# EAGLE board PCB-2x8GPIO (EAGLE 6.4)
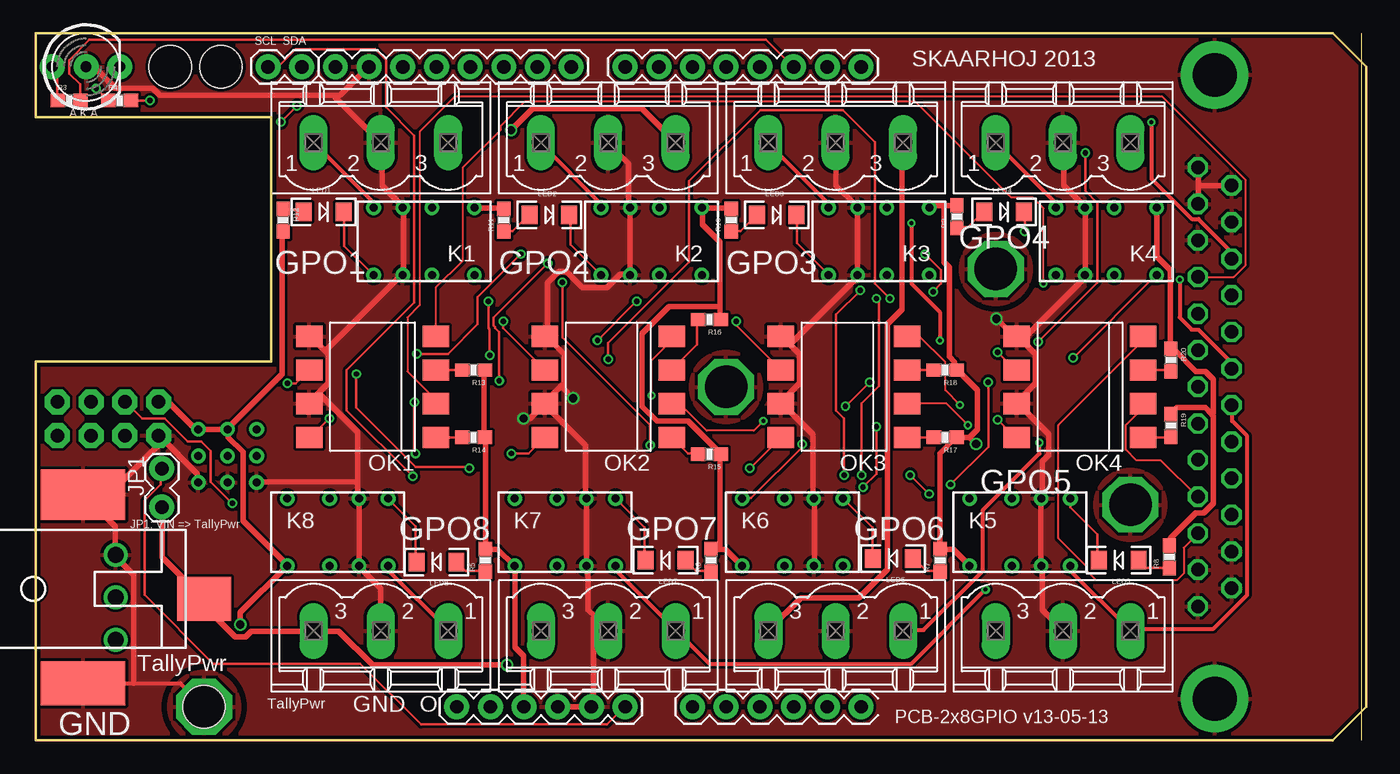
[diagram p0: board, top side]
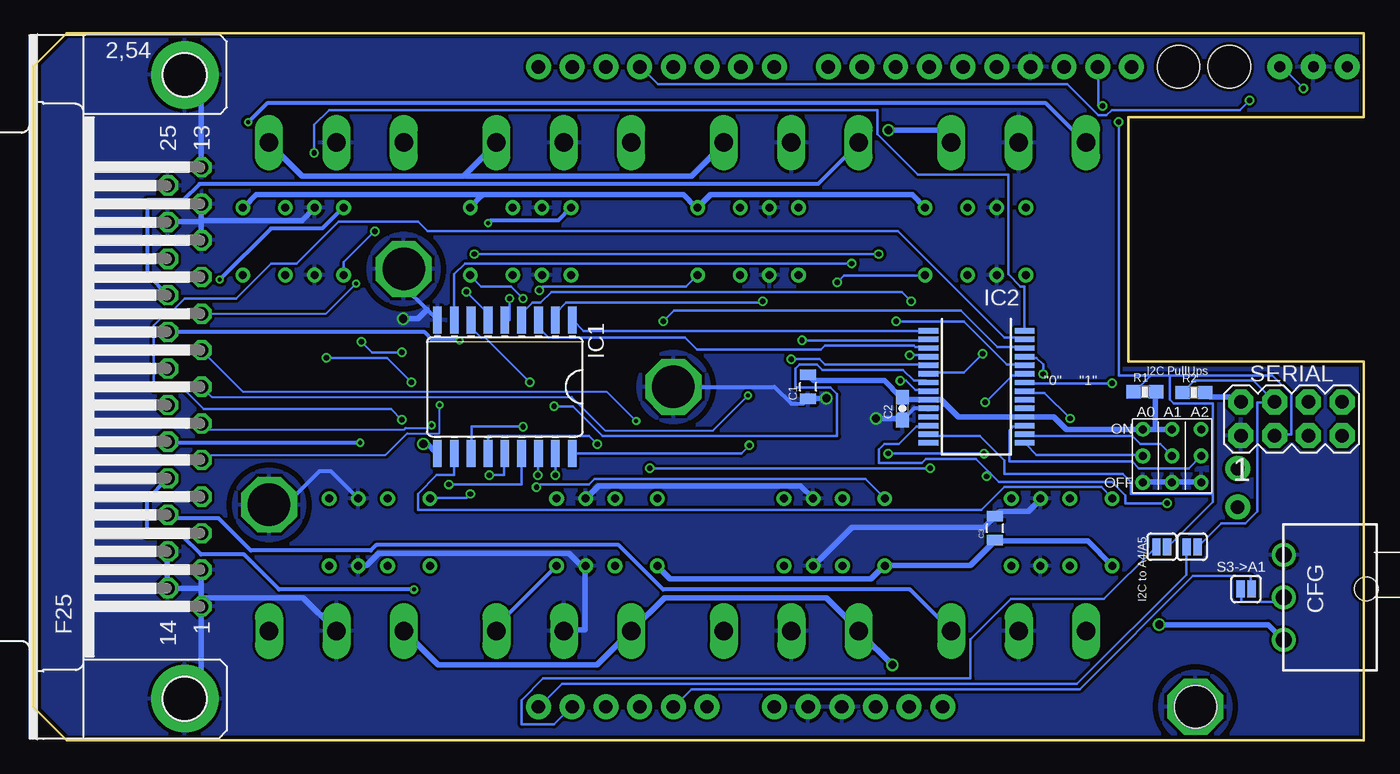
[diagram p1: board, bottom side, seen from below]

Size 100.33 x 53.34 mm. Coordinates in mm from the lower left corner, seen from the top.
Outline: 100,0 100,53.33
Copper layers (1*16): Top 0.035mm / dielectric 1.5mm / Bottom 0.035mm
Design rules "Fusion_eagle_rule_v1.1": minimum track width 6mil, minimum drill 12mil, track to track 6mil, track to pad 6mil, pad to pad 6mil, via to via 6mil, smd to smd 0mil, copper to edge 10mil, drill to drill 10mil, minimum pad ring 10mil, minimum via ring 6mil, stop-mask expansion 2mil, vias tented up to drill 100mil, thermal gap 10mil
Net classes: 0 default: width 0.203 mm, drill 0.406 mm, clearance 0.203 mm; 1 PWR: width 0.406 mm, drill 0.61 mm, clearance 0.203 mm; 2 RELAY LINES: width 0.305 mm, clearance 0.203 mm; 3 INput lines: clearance 0.203 mm
Holes 3.2 mm at 10.16,50.8
tRestrict: area 69.4,32.6 to 75.4,38.6; area 79.5,14.8 to 85.5,20.8; area 9.7,-0.5 to 15.7,5.5; area 49.1,23.7 to 55.1,29.7; area 49.1,23.7 to 55.1,29.7
bRestrict: area 9.7,-0.5 to 15.7,5.5; area 49.1,23.7 to 55.1,29.7; area 69.4,32.6 to 75.4,38.6; area 79.5,14.8 to 85.5,20.8

## Footprints (pad centres in the part's own frame; a part is rotated, then mirrored left to right if it is on the bottom)
0805 = smd 0.8 x 1.2: 1 -0.9,0; 2 0.9,0
0603-CAP = smd 1.1 x 1: 1 -0.85,0; 2 0.85,0
ARDUINO_BOXSHIELD_NOHOLES = drill 1.016 pad 1.88: 0 62.23,50.8; 1 59.69,50.8; 2 57.15,50.8; 3 54.61,50.8; 3.3V 34.29,2.54; 4 52.07,50.8; 5 49.53,50.8; 5V@0 36.83,2.54; 6 46.99,50.8; 7 44.45,50.8; 8 40.386,50.8; 9 37.846,50.8; 10 35.306,50.8; 11 32.766,50.8; 12 30.226,50.8; 13 27.686,50.8; A0 49.53,2.54; A1 52.07,2.54; A2 54.61,2.54; A3 57.15,2.54; A4 59.69,2.54; A5 62.23,2.54; AREF 22.606,50.8; GND@0 39.37,2.54; GND@1 41.91,2.54; GND@4 25.146,50.8; RESET 31.75,2.54; VIN 44.45,2.54 | hole 3.2: 13.97,50.8; 12.7,2.54
MSTBV3 = drill 1.397 long: 1 -5.08,0; 2 0,0; 3 5.08,0
SO18W = smd 0.66 x 2.032: 1 -5.08,-5.029; 2 -3.81,-5.029; 3 -2.54,-5.029; 4 -1.27,-5.029; 5 0,-5.029; 6 1.27,-5.029; 7 2.54,-5.029; 8 3.81,-5.029; 9 5.08,-5.029; 10 5.08,5.029; 11 3.81,5.029; 12 2.54,5.029; 13 1.27,5.029; 14 0,5.029; 15 -1.27,5.029; 16 -2.54,5.029; 17 -3.81,5.029; 18 -5.08,5.029
SSOP28 = smd 0.4 x 1.5: 1 -4.225,-3.625; 2 -3.575,-3.625; 3 -2.925,-3.625; 4 -2.275,-3.625; 5 -1.625,-3.625; 6 -0.975,-3.625; 7 -0.325,-3.625; 8 0.325,-3.625; 9 0.975,-3.625; 10 1.625,-3.625; 11 2.275,-3.625; 12 2.925,-3.625; 13 3.575,-3.625; 14 4.225,-3.625; 15 4.225,3.625; 16 3.575,3.625; 17 2.925,3.625; 18 2.275,3.625; 19 1.625,3.625; 20 0.975,3.625; 21 0.325,3.625; 22 -0.325,3.625; 23 -0.975,3.625; 24 -1.625,3.625; 25 -2.275,3.625; 26 -2.925,3.625; 27 -3.575,3.625; 28 -4.225,3.625
1X02_LOCK = drill 1.016 pad 1.88: 1 -0.178,0; 2 2.718,0
1X02 = drill 1.016 pad 1.88: 1 0,0; 2 2.54,0
DS2Y = drill 0.6: 1 1.2,0.46; 16 1.2,5.54; O1 4.4,0.46; O2 4.4,5.54; P1 6.6,0.46; P2 6.6,5.54; S1 8.8,0.46; S2 8.8,5.54
LED-1206 = smd 1.2 x 1.4: A -1.5,0; C 1.5,0
DIL8-SMD = smd 1.6 x 2: 1 -3.81,-4.77; 2 -1.27,-4.77; 3 1.27,-4.77; 4 3.81,-4.77; 5 3.81,4.77; 6 1.27,4.77; 7 -1.27,4.77; 8 -3.81,4.77
0603-RES = smd 1.1 x 1: 1 -0.85,0; 2 0.85,0
TECONNECTIVITY-DPST = drill 1.2: P$1 3,3.2; P$2 3,0; P$3 3,-3.2
SJ_2S = smd 0.635 x 1.27: 1 -0.412,0; 2 0.412,0
2X4 = drill 1.016 pad 1.88 octagon: 1 -3.81,-1.27; 2 -3.81,1.27; 3 -1.27,-1.27; 4 -1.27,1.27; 5 1.27,-1.27; 6 1.27,1.27; 7 3.81,-1.27; 8 3.81,1.27
POWER_JACK_SMD = smd 6.35 x 3.81: GND -6.756,-7.112 | smd 4.064 x 3.302: PWR -15.9,0.762 | smd 6.35 x 3.302: SHUNT -6.756,7.112 | hole 1.778: -2.997,0
3.2MMPAD = drill 3.2 octagon: P$1 0,0
LED5MM-BICOLOR = drill 0.813 pad 1.88: A2 2.54,0; A3 -2.54,0; K1 0,0
3BITADDR = drill 0.6: A0 -2.2,0; A1 0,0; A2 2.2,0; H1 -2.2,2; H2 0,2; H3 2.2,2; L1 -2.2,-2; L2 0,-2; L3 2.2,-2
F25HP = drill 1.016 octagon: 1 -16.561,-1.27; 2 -13.792,-1.27; 3 -11.049,-1.27; 4 -8.28,-1.27; 5 -5.512,-1.27; 6 -2.769,-1.27; 7 0,-1.27; 8 2.769,-1.27; 9 5.512,-1.27; 10 8.28,-1.27; 11 11.049,-1.27; 12 13.792,-1.27; 13 16.561,-1.27; 14 -15.189,1.27; 15 -12.421,1.27; 16 -9.652,1.27; 17 -6.909,1.27; 18 -4.14,1.27; 19 -1.372,1.27; 20 1.372,1.27; 21 4.14,1.27; 22 6.909,1.27; 23 9.652,1.27; 24 12.421,1.27; 25 15.189,1.27 | drill 3.302 pad 5.08: G1 -23.52,0; G2 23.52,0

## Placement (x,y rotation side)
C1  100nF  [0805]  41.91,26.67 90 bottom
C2  100nF  [0603-CAP]  34.8,25.02 90 bottom
C3  10uF  [0805]  27.81,16 90 bottom
GND  ARDUINO_SHIELD  [ARDUINO_BOXSHIELD_NOHOLES]  0,0 0 top
GPO1  CON1  [MSTBV3]  26.04,45.09 0 top
GPO2  CON1  [MSTBV3]  43.18,45.09 0 top
GPO3  CON1  [MSTBV3]  60.33,45.09 0 top
GPO4  CON1  [MSTBV3]  77.47,45.09 0 top
GPO5  CON1  [MSTBV3]  77.47,8.26 180 top
GPO6  CON1  [MSTBV3]  60.33,8.26 180 top
GPO7  CON1  [MSTBV3]  43.18,8.26 180 top
GPO8  GPO8  [MSTBV3]  26.04,8.26 180 top
IC1  ULN2803A  [SO18W]  64.77,26.67 180 bottom
IC2  MCP23017SS  [SSOP28]  29.21,26.67 270 bottom
JP1  [1X02_LOCK]  9.53,17.78 90 top
JP4  [1X02]  20.07,50.8 180 top
K1  RELAY5VIM03  [DS2Y]  34.29,40.64 180 top
K2  RELAY5VIM03  [DS2Y]  51.44,40.64 180 top
K3  RELAY5VIM03  [DS2Y]  68.58,40.64 180 top
K4  RELAY5VIM03  [DS2Y]  85.72,40.64 180 top
K5  RELAY5VIM03  [DS2Y]  69.22,12.7 0 top
K6  RELAY5VIM03  [DS2Y]  52.07,12.7 0 top
K7  RELAY5VIM03  [DS2Y]  34.92,12.7 0 top
K8  RELAY5VIM03  [DS2Y]  17.78,12.7 0 top
LED1  [LED-1206]  21.72,39.88 0 top
LED2  [LED-1206]  38.73,39.62 0 top
LED3  [LED-1206]  55.88,39.62 0 top
LED4  [LED-1206]  73.03,39.88 0 top
LED5  [LED-1206]  81.66,13.59 180 top
LED6  [LED-1206]  64.64,13.72 180 top
LED7  [LED-1206]  47.5,13.59 180 top
LED8  [LED-1206]  30.23,13.46 180 top
OK1  LTV826S  [DIL8-SMD]  25.4,26.67 90 top
OK2  LTV826S  [DIL8-SMD]  43.18,26.67 90 top
OK3  LTV826S  [DIL8-SMD]  60.96,26.67 90 top
OK4  LTV826S  [DIL8-SMD]  78.74,26.67 90 top
R1  1K5  [0603-RES]  16.51,26.29 0 bottom
R2  1K5  [0603-RES]  12.83,26.24 0 bottom
R3  270  [0603-RES]  2.54,48.26 0 top
R4  270  [0603-RES]  6.35,48.26 0 top
R5  [0603-RES]  33.91,13.59 90 top
R6  [0603-RES]  50.93,13.59 90 top
R7  [0603-RES]  68.2,13.59 90 top
R8  [0603-RES]  85.47,13.84 90 top
R9  [0603-RES]  69.47,39.5 90 top
R10  [0603-RES]  52.45,39.24 90 top
R11  [0603-RES]  35.31,39.24 90 top
R12  [0603-RES]  18.67,39.24 270 top
R13  [0603-RES]  33.02,27.94 180 top
R14  [0603-RES]  33.02,22.86 180 top
R15  [0603-RES]  50.8,21.59 180 top
R16  [0603-RES]  50.8,31.75 180 top
R17  [0603-RES]  68.58,22.86 180 top
R18  [0603-RES]  68.58,27.94 180 top
R19  [0603-RES]  85.6,23.75 270 top
R20  [0603-RES]  85.6,28.7 270 top
S3  CFG  [TECONNECTIVITY-DPST]  3.05,10.79 180 bottom
S3->A1  SOLDERJUMPERNC  [SJ_2S]  8.89,11.43 0 bottom
SERIAL  M04X2  [2X4]  5.46,24.26 0 bottom
SJ1  SOLDERJUMPERNC  [SJ_2S]  15.24,14.61 180 bottom
SJ2  SOLDERJUMPERNC  [SJ_2S]  12.95,14.61 180 bottom
U$3  POWER_JACK_SMD  [POWER_JACK_SMD]  -3.17,11.43 180 top
U$5  GNDPAD  [3.2MMPAD]  12.7,2.54 0 top
U$6  GNDPAD  [3.2MMPAD]  52.07,26.67 0 top
U$7  LEDBICOLOR-AKA  [LED5MM-BICOLOR]  3.81,50.8 0 top
U$8  GNDPAD  [3.2MMPAD]  72.39,35.56 0 top
U$15  GNDPAD  [3.2MMPAD]  82.55,17.78 0 top
U$19  3BITADDR  [3BITADDR]  14.48,21.46 0 bottom
X1  DB25F  [F25HP]  88.9,26.67 90 bottom

## Library data of the parts
C1-C3 JP1 JP4 LED1-LED8 R1-R20 S3->A1 SERIAL SJ1 SJ2 = SparkFun
GND K1-K8 S3 U$3 U$5-U$8 U$15 U$19 = SKAARHOJ
GPO1-GPO8 = con-phoenix-508; MPN: MSTBV 2,5/3-GF-5.08; OC_FARNELL: 1792793; OC_NEWARK: 69R9846
IC1 = uln-udn
IC2 = microchip; MF: MICROCHIP; MPN: MCP23017-E/SS; OC_FARNELL: 1467674; OC_NEWARK: 31K2960
OK1-OK4 = optocoupler; OC_FARNELL: unknown; OC_NEWARK: unknown
X1 = con-subd; OC_FARNELL: unknown; OC_NEWARK: unknown

## Nets
5V [PWR]: C1.2 C2.2 C3.1 GND.5V@0 IC1.10 IC2.9 IC2.18 K1.1 K2.1 K3.1 K4.1 K5.1 K6.1 K7.1 K8.1 R1.2 R2.2 R5.2 R6.2 R7.2 R8.2 R9.2 R10.2 R11.2 R12.2 R13.1 R14.1 R15.1 R16.1 R17.1 R18.1 R19.1 R20.1 S3.P$1 SERIAL.2 U$19.H1 U$19.H2 U$19.H3
A0: IC2.15 U$19.A0
A1: IC2.16 U$19.A1
A1CFG: GND.A1 S3->A1.2
A2: IC2.17 U$19.A2
D2: GND.2 R3.2
D3: GND.3 R4.2
GND [PWR]: C1.1 C2.1 C3.2 GND.GND@0 GND.GND@1 GND.GND@4 GPO1.2 GPO2.2 GPO3.2 GPO4.2 GPO5.2 GPO6.2 GPO7.2 GPO8.2 IC1.9 IC2.10 K1.P1 K1.P2 K2.P1 K2.P2 K3.P1 K3.P2 K4.P1 K4.P2 K5.P1 K5.P2 K6.P1 K6.P2 K7.P1 K7.P2 K8.P1 K8.P2 OK1.5 OK1.7 OK2.5 OK2.7 OK3.5 OK3.7 OK4.5 OK4.7 S3.P$3 SERIAL.1 U$3.GND U$3.SHUNT U$5.P$1 U$6.P$1 U$7.K1 U$8.P$1 U$15.P$1 U$19.L1 U$19.L2 U$19.L3 X1.1 X1.2 X1.11 X1.12 X1.13 X1.14 X1.15 X1.24 X1.25 X1.G1 X1.G2
I2C_SCL: IC2.12 JP4.2 R2.1 SERIAL.4 SJ2.1
I2C_SDA: IC2.13 JP4.1 R1.1 SERIAL.3 SJ1.1
N$1 [RELAY LINES]: GPO1.1 K1.S1 X1.23
N$2: S3->A1.1 S3.P$2
N$3: K1.S2 LED1.C
N$4: IC1.18 K1.16
N$5: IC1.1 IC2.1
N$6 [RELAY LINES]: GPO2.1 K2.S1 X1.22
N$7: R4.1 U$7.A2
N$8: K2.S2 LED2.C
N$9: IC1.17 K2.16
N$10 [RELAY LINES]: GPO3.1 K3.S1 X1.21
N$11: R3.1 U$7.A3
N$12: K3.S2 LED3.C
N$13: IC1.16 K3.16
N$14 [RELAY LINES]: GPO4.1 K4.S1 X1.20
N$15: LED8.A R5.1
N$16: K4.S2 LED4.C
N$17: IC1.15 K4.16
N$18 [RELAY LINES]: GPO5.1 K5.S1 X1.19
N$19: GND.A4 SJ1.2
N$20: K5.S2 LED5.C
N$21: IC1.14 K5.16
N$22 [RELAY LINES]: GPO6.1 K6.S1 X1.18
N$23: GND.A5 SJ2.2
N$24: K6.S2 LED6.C
N$25: IC1.13 K6.16
N$26 [RELAY LINES]: GPO7.1 K7.S1 X1.17
N$27: LED7.A R6.1
N$28: K7.S2 LED7.C
N$29: IC1.12 K7.16
N$30 [RELAY LINES]: GPO8.1 K8.S1 X1.16
N$31 [PWR]: GPO1.3 GPO2.3 GPO3.3 GPO4.3 GPO5.3 GPO6.3 GPO7.3 GPO8.3 JP1.1 U$3.PWR
N$32: K8.S2 LED8.C
N$33: IC1.11 K8.16
N$34: IC1.2 IC2.2
N$35: IC1.3 IC2.3
N$36: IC1.4 IC2.4
N$37: IC1.5 IC2.5
N$38: IC1.6 IC2.6
N$39: IC1.7 IC2.7
N$40: IC1.8 IC2.8
N$41: LED6.A R7.1
N$42: LED5.A R8.1
N$43: LED4.A R9.1
N$44: LED3.A R10.1
N$45: LED2.A R11.1
N$46: LED1.A R12.1
N$47: OK1.3 R13.2
N$48: OK1.1 R14.2
N$49 [INput lines]: OK1.2 X1.10
N$50: OK2.1 R15.2
N$51: IC2.21 OK1.8
N$52: OK2.3 R16.2
N$53: OK3.1 R17.2
N$54: OK3.3 R18.2
N$55 [INput lines]: OK3.2 X1.6
N$56: OK4.1 R19.2
N$57: OK4.3 R20.2
N$60 [INput lines]: OK1.4 X1.9
N$61 [INput lines]: OK2.2 X1.8
N$62 [INput lines]: OK2.4 X1.7
N$63: IC2.28 OK4.6
N$64 [INput lines]: OK3.4 X1.5
N$65 [INput lines]: OK4.2 X1.4
N$66 [INput lines]: OK4.4 X1.3
N$68: IC2.22 OK1.6
N$69: IC2.23 OK2.8
N$70: IC2.24 OK2.6
N$71: IC2.25 OK3.8
N$72: IC2.26 OK3.6
N$73: IC2.27 OK4.8
VIN: GND.VIN JP1.2

## Tracks (layer width: path | path; a pad name or v marks a point on that pad's centre or on a via)
5V  (via drill 0.61)
  Top 0.406: 88.7,24.59 88.19,25.09 86.06,25.09 85.65,24.69 R19.1 | 88.7,24.59 88.8,24.49 88.8,17.88 88.09,17.17 87.48,17.17 85.55,15.24 85.55,14.73 R8.2 | 88.7,24.59 88.8,24.69 88.8,27.23 88.19,27.84 87.48,27.84 85.85,29.46 85.65,29.46 R20.1 85.55,29.67 85.55,35.46 84.53,36.47 84.53,40.13 K4.1 | R11.2 35.26,40.13 33.12,40.13 K1.1 | 51.61,32.72 51.61,37.59 50.29,38.91 50.29,40.13 K2.1 50.49,40.13 52.43,40.13 R10.2 | 51.61,32.72 51.61,31.8 R16.1 | K5.1 70.41,13.21 69.19,14.43 68.28,14.43 R7.2 68.17,14.63 68.17,21.64 69.29,22.76 R17.1 70.41,22.86 | 68.48,40.34 67.56,40.34 67.46,40.23 K3.1 | 68.48,40.34 69.39,40.34 R9.2 | 70.41,22.86 71.02,23.47 71.02,26.42 69.49,27.94 R18.1 69.29,28.04 69.29,28.55 68.89,28.96 68.89,35.66 68.48,36.07 68.48,40.34 | 70.41,22.86 v70.92,22.35 | R12.2 18.59,38.3 18.59,27.64 14.43,23.47 U$19.H2 | U$19.H2 14.22,23.47 12.29,23.47 U$19.H3 12.09,23.47 10.06,25.5 9.35,25.5 SERIAL.2 | 51.61,14.43 52.02,14.43 53.24,13.21 K6.1 | 51.61,14.43 51,14.43 R6.2 | 51.61,14.43 51.61,21.54 R15.1 51.51,21.74 49.17,24.08 46.84,24.08 45.72,25.2 45.72,30.68 47.75,32.72 51.61,32.72 | R13.1 33.83,27.94 33.83,22.86 R14.1 33.93,22.76 33.93,14.63 R5.2 33.93,14.43 34.85,14.43 36.07,13.21 K7.1 36.17,13.01 36.17,7.01 36.78,6.4 36.78,2.54 GND.5V@0 | v15.44,8.74 15.44,9.65 18.9,13.11 K8.1 18.9,13.31 15.65,16.56 15.65,21.74 14.53,22.86 14.53,23.27 U$19.H2
  Bottom 0.406: K1.1 33.12,40.23 34.04,41.15 49.28,41.15 50.19,40.23 K2.1 50.39,40.23 51.31,41.15 66.45,41.15 66.55,41.05 | v70.92,22.35 70.61,22.35 69.9,21.64 IC1.10 | 66.55,41.05 67.36,40.23 K3.1 | K4.1 84.43,40.23 83.52,41.15 66.65,41.15 66.55,41.05 | C1.2 41.86,27.53 41.45,27.13 36.17,27.13 34.95,25.91 C2.2 34.75,25.81 34.65,25.7 32.92,25.7 IC2.9 32.72,25.7 31.9,25.7 30.58,24.38 25.6,24.38 IC2.18 25.4,24.38 23.37,24.38 22.45,23.47 16.87,23.47 U$19.H1 16.66,23.47 15.75,23.47 | SERIAL.2 9.65,25.91 11.58,25.91 11.89,26.21 R2.2 | 15.75,23.47 15.75,26.21 R1.2 | 15.75,23.47 14.53,23.47 U$19.H2 | K8.1 19,13.21 20.83,15.04 27.64,15.04 C3.1 27.84,15.04 29.67,13.21 36.07,13.21 K7.1 36.27,13.11 37.19,12.19 52.32,12.19 53.24,13.11 K6.1 | v15.44,8.74 7.21,8.74 6.1,7.62 S3.P$1
A0
  Bottom 0.203: IC2.15 25.5,22.35 24.69,21.54 16.76,21.54 U$19.A0
A1
  Bottom 0.203: IC2.16 25.5,23.06 25.4,22.96 17.48,22.96 16.87,22.35 15.34,22.35 14.53,21.54 U$19.A1
A1CFG
  Bottom 0.203: S3->A1.2 8.53,11.48 8.53,12.39 12.9,12.39 21.44,3.86 50.7,3.86 52.02,2.54 GND.A1
A2
  Bottom 0.203: IC2.17 25.6,23.67 26.42,23.67 26.72,23.37 26.72,21.03 17.48,21.03 16.97,20.52 13.21,20.52 12.29,21.44 U$19.A2
D2
  Top 0.203: R3.2 3.35,48.26 3.35,49.48 2.54,50.29 2.54,51.31 4.06,52.83 55.07,52.83 57.1,50.8 GND.2
D3  (via drill 0.41)
  Top 0.203: v8.64,48.26 R4.2
  Bottom 0.203: v8.64,48.26 9.35,47.55 19,47.55 19.41,47.14 20.02,47.14 22.35,49.48 53.24,49.48 54.56,50.8 GND.3
GND  (via drill 0.61)
  Top 0.305: U$3.SHUNT 7.42,4.32 10.92,4.32 U$5.P$1
  Top 0.406: GPO2.2 43.18,45.01 44.7,43.48 44.7,40.34 K2.P1 44.81,40.13 44.81,35.15 K2.P2 44.6,35.15 44.09,35.15 43.08,34.14 41.25,34.14 40.03,35.36 39.42,35.36 38.61,34.54 38.61,30.58 OK2.5 38.51,30.48 39.83,29.16 39.83,26.92 39.62,26.72 | GND.GND@0 GND.GND@1 42.06,2.64 42.06,9.25 42.16,9.35 | 39.62,26.72 38.51,25.6 38.51,25.4 OK2.7 | v36.78,24.28 37.29,24.28 38.3,25.3 OK2.7 | 42.16,9.35 43.18,8.33 GPO7.2 | 42.16,9.35 41.66,9.86 41.66,13.01 K7.P1 41.55,13.21 41.55,18.19 K7.P2 41.45,18.39 41.45,22.25 38.61,25.09 38.61,25.3 OK2.7 | 39.62,26.72 v40.54,25.81 | U$19.L3 12.19,19.51 12.19,20.12 9.35,22.96 SERIAL.1 9.55,22.55 4.67,17.68 U$3.GND 3.66,18.49 5.99,16.15 5.99,14.02 S3.P$3 6.1,13.82 7.42,12.5 7.42,4.32 | U$7.K1 4.37,50.8 5.99,49.17 8.84,49.17 9.35,48.67 22.55,48.67 | 22.55,48.67 22.96,48.67 25.09,50.8 GND.GND@4 | 22.55,48.67 22.55,48.56 GPO1.2 26.11,44.91 26.11,41.86 27.64,40.34 K1.P1 27.74,40.13 27.74,35.15 K1.P2 27.53,35.05 21.84,29.36 | GPO8.2 26.01,8.33 26.01,11.48 24.49,13.01 K8.P1 24.38,13.21 24.38,18.19 K8.P2 24.28,18.39 24.28,19.51 | 21.84,29.36 20.73,30.48 OK1.5 | 21.84,29.36 22.05,29.16 22.05,26.92 20.73,25.6 20.73,25.4 OK1.7 21.44,26.11 24.28,23.27 24.28,19.51 | 24.28,19.51 16.76,19.51 U$19.L1 | K6.P1 58.73,13.21 58.73,18.19 K6.P2 58.62,18.39 58.62,23.06 56.39,25.3 OK3.7 56.29,25.4 56.29,25.6 57.61,26.92 57.61,29.16 56.29,30.48 OK3.5 57,29.97 61.98,34.95 K3.P2 61.98,35.15 61.98,40.13 K3.P1 61.87,40.34 60.35,41.86 60.35,45.01 GPO3.2 | GPO5.2 77.42,8.33 75.89,9.86 75.89,13.01 K5.P1 75.79,13.21 75.79,18.19 K5.P2 75.89,18.39 75.89,21.03 76.4,21.54 76.4,23.06 74.17,25.3 OK4.7 74.07,25.4 74.07,25.6 75.39,26.92 75.39,29.16 74.07,30.48 OK4.5
  Top 0.406: OK4.5 74.47,30.28 79.15,34.95 K4.P2 79.15,35.15 79.15,40.13 K4.P1 79.05,40.34 77.52,41.86 77.52,45.01 GPO4.2 | v72.44,31.8 73.76,30.48 OK4.5 | 87.68,41.86 87.68,40.54 X1.12 | 87.68,41.86 87.68,43.18 X1.13 | 87.68,41.86 X1.25
  Bottom 0.305: IC2.10 33.92,25.05 C2.1 | U$8.P$1 72.39,34.24 70.64,32.49 IC1.9 | U$15.P$1 81.28,17.78 78.74,20.32 77.89,20.32 K5.P2 | U$6.P$1 44.45,26.67 43.18,25.4 42.28,25.4 C1.1
  Bottom 0.406: v36.78,24.28 34.85,24.28 C2.1 | v40.54,25.81 41.86,25.81 C1.1 | U$19.L3 12.29,19.51 14.43,19.51 U$19.L2 14.63,19.51 16.66,19.51 U$19.L1 | K8.P2 24.38,18.19 25.3,17.27 27.43,17.27 27.74,16.97 C3.2 27.94,16.76 28.65,16.05 38.61,16.05 41.45,13.21 K7.P1 | GPO6.2 60.25,8.33 58.73,8.33 58.73,13.11 K6.P1 58.93,13.11 59.94,14.12 74.27,14.12 75.18,13.21 75.79,13.21 K5.P1 | 87.68,11.48 87.68,12.8 X1.2 | 87.68,11.48 87.68,10.16 X1.1 | 87.68,11.48 X1.14 90.22,11.58 90.22,14.22 X1.15 | X1.G1 87.68,3.15 87.68,9.96 X1.1 | GPO5.2 77.52,8.33 79.96,10.77 87.58,10.77 X1.1 | 70.64,32.49 71.32,31.8 v72.44,31.8 | 87.68,39.22 87.68,40.44 X1.12 | 87.68,39.22 87.68,39.12 | 87.68,39.12 87.68,37.8 X1.11 | 87.68,39.12 90.12,39.12 X1.24 | X1.G2 87.68,50.19 87.68,43.28 X1.13 | 87.68,39.22 80.06,39.22 79.15,40.13 K4.P1 | K7.P2 41.55,18.29 42.47,19.2 57.71,19.2 58.62,18.29 K6.P2
  pour Bottom: 0,0 100.33,0 100.33,53.34 0,53.34
  pour Top: 0,0 100.33,0 100.33,53.34 0,53.34
I2C_SCL  (via drill 0.41)
  Top 0.203: v14.83,17.88 13.21,19.51 13.21,21.84 12.5,22.55 11.48,22.55 9.75,24.28 8.03,24.28 6.81,25.5 SERIAL.4 | JP4.2 18.29,50.8 19.61,52.12 25.6,52.12 26.42,51.31 26.42,47.75 28.55,45.62 28.55,33.02 23.47,27.94 23.47,24.89 v28.45,19.91
  Bottom 0.203: R2.1 13.61,26.31 12.8,27.13 8.33,27.13 SERIAL.4 6.81,25.5 8.03,25.5 8.03,17.27 8.94,16.36 10.77,16.36 12.5,14.63 SJ2.1 | 28.19,20.17 27.53,19.51 19,19.51 17.98,18.49 17.98,17.88 v14.83,17.88 | 28.19,20.17 29.26,21.23 33.02,21.23 33.33,20.93 36.58,20.93 36.58,21.95 36.17,22.35 35.05,22.35 33.73,23.67 32.92,23.67 IC2.12 | 28.19,20.17 v28.45,19.91
I2C_SDA  (via drill 0.41)
  Top 0.203: v18.49,46.63 v19.71,47.85
  Bottom 0.203: 16.1,27.48 16.05,27.53 14.63,27.53 | 16.1,27.48 17.27,26.31 R1.1 | 14.63,27.53 6.91,27.53 5.49,26.11 5.49,23.06 6.71,23.06 SERIAL.3 | 11.38,18.59 11.38,25.4 14.33,25.4 14.63,25.7 14.63,27.53 | 11.38,18.59 11.38,17.98 14.73,14.63 SJ1.1 | 11.38,18.59 17.58,18.59 17.58,19.51 18.19,20.12 27.13,20.12 27.13,21.13 28.96,22.96 32.72,22.96 32.82,23.06 IC2.13 | v19.71,47.85 20.02,47.85 20.02,50.8 JP4.1 | v18.49,46.63 18.49,27.53 16.15,27.53 16.1,27.48
N$1  (via drill 0.3)
  Top 0.305: GPO1.1 25.4,40.64 25.4,40.23 K1.S1 | v84.12,46.63 84.12,42.37 87.17,39.32 87.68,39.32 90.12,36.88 90.12,36.37 X1.23
  Bottom 0.305: v84.12,46.63 82.7,48.06 23.98,48.06 21.03,45.11 GPO1.1
N$2
  Bottom 0.203: S3->A1.1 9.25,11.38 9.25,10.46 6.4,10.46 6.1,10.77 S3.P$2
N$3
  Top 0.203: LED1.C 23.27,39.83 23.27,37.29 25.4,35.15 K1.S2
N$4  (via drill 0.41)
  Top 0.203: v46.33,22.25 46.33,23.77 39.73,30.38 v39.73,34.54
  Bottom 0.203: IC1.18 46.94,21.64 v46.33,22.25 | v39.73,34.54 39.22,35.05 33.12,35.05 K1.16
N$5
  Bottom 0.203: IC2.1 32.92,30.89 58.83,30.89 59.64,31.7 IC1.1
N$6
  Top 0.305: K2.S1 42.57,40.23 42.57,40.54 38.1,45.01 GPO2.1
  Bottom 0.305: X1.22 91.75,35.15 91.75,40.74 89,40.74 87.78,41.96 41.15,41.96 38.1,45.01 GPO2.1
N$7  (via drill 0.41)
  Top 0.203: v4.57,49.17 5.49,48.26 R4.1
  Bottom 0.203: v4.57,49.17 6.2,50.8 U$7.A2
N$8
  Top 0.203: LED2.C 40.34,39.62 40.34,37.39 42.57,35.15 K2.S2
N$9  (via drill 0.41)
  Top 0.203: v60.96,20.02 60.96,24.28 60.35,24.89 60.35,32.11 v62.18,33.93
  Bottom 0.203: v60.96,20.02 IC1.17 | v62.18,33.93 61.87,34.24 51.1,34.24 50.29,35.05 K2.16
N$10  (via drill 0.3)
  Top 0.305: K3.S1 59.74,40.23 59.74,40.54 55.27,45.01 GPO3.1 | v68.17,30.18 68.17,32.31 66.04,34.44 v66.04,39.01
  Bottom 0.305: v68.17,30.18 70.21,30.18 70.81,30.79 90.12,30.79 X1.21 | v66.04,39.01 65.84,39.22 60.76,39.22 59.84,40.13 K3.S1
N$11
  Top 0.203: R3.1 1.63,48.26 1.63,50.49 1.32,50.8 U$7.A3
N$12
  Top 0.203: LED3.C 57.4,39.62 57.4,37.49 59.74,35.15 K3.S2
N$13  (via drill 0.41)
  Top 0.203: v62.28,20.02 62.28,25.4 63.6,26.72 63.6,33.12 v63.4,33.33
  Bottom 0.203: v62.28,20.02 62.28,21.64 IC1.16 | v63.4,33.33 64.31,34.24 66.55,34.24 67.36,35.05 K3.16
N$14  (via drill 0.3)
  Top 0.305: K4.S1 76.91,40.23 76.91,40.54 72.44,45.01 GPO4.1 | v86.26,34.75 86.26,31.9 87.17,30.99 87.68,30.99 90.12,28.55 90.12,28.04 X1.20
  Bottom 0.305: v86.26,34.75 82.4,38.61 78.54,38.61 77.01,40.13 K4.S1
N$15
  Top 0.203: R5.1 33.83,12.8 32.41,12.8 31.8,13.41 LED8.A
N$16  (via drill 0.41)
  Top 0.203: v74.57,38.41 74.57,39.83 LED4.C
  Bottom 0.203: v74.57,38.41 76.91,36.07 76.91,35.15 K4.S2
N$17  (via drill 0.41)
  Top 0.203: v68.99,19.3 71.83,22.15 v71.83,27.03 | v78.23,28.85 84.43,35.05 K4.16
  Bottom 0.203: IC1.15 63.5,19.3 v68.99,19.3 | v71.83,27.03 73.66,28.85 v78.23,28.85
N$18
  Top 0.305: K5.S1 78.03,13.11 78.03,12.8 82.5,8.33 GPO5.1 82.6,8.43 88.8,8.43 91.34,10.97 91.34,22.96 90.22,24.08 90.22,25.3 X1.19
N$19
  Bottom 0.203: SJ1.2 15.75,14.53 19.61,10.67 26.62,10.67 29.67,7.62 29.67,4.67 61.87,4.67 63.5,3.05 63.5,1.22 61.06,1.22 59.74,2.54 GND.A4
N$20
  Top 0.203: LED5.C 80.06,13.61 80.06,15.54 78.03,17.58 78.03,18.19 K5.S2
N$21  (via drill 0.41)
  Top 0.203: v67.36,18.59 v65.94,20.02
  Bottom 0.203: v65.94,20.02 64.82,20.02 64.82,21.64 IC1.14 | v67.36,18.59 67.67,18.29 70.41,18.29 K5.16
N$22  (via drill 0.3)
  Top 0.305: v75.69,22.45 75.69,21.64 71.42,17.37 71.42,12.8 66.95,8.33 65.43,8.33 GPO6.1
  Bottom 0.305: K6.S1 60.96,13.11 65.33,8.74 65.33,8.33 GPO6.1 | v75.69,22.45 90.12,22.45 X1.18
N$23
  Bottom 0.203: SJ2.2 13.41,14.53 13.41,12.5 21.64,4.27 60.45,4.27 62.18,2.54 GND.A5
N$24
  Top 0.203: LED6.C 63.09,13.72 63.09,16.05 60.96,18.19 K6.S2
N$25  (via drill 0.41)
  Top 0.203: v57.81,22.35 57.81,22.15 53.95,18.29 53.34,18.29 K6.16
  Bottom 0.203: IC1.13 66.04,22.96 58.42,22.96 v57.81,22.35
N$26  (via drill 0.3)
  Top 0.305: K7.S1 43.79,13.11 43.79,12.8 48.26,8.33 GPO7.1 48.36,8.23 50.8,5.79 66.04,5.79 v71.63,11.38
  Bottom 0.305: X1.17 91.75,18.19 91.75,15.44 89.1,15.44 87.68,14.02 84.43,14.02 81.79,11.38 v71.63,11.38
N$27
  Top 0.203: R6.1 50.9,12.8 49.78,12.8 49.07,13.51 LED7.A
N$28
  Top 0.203: LED7.C 45.92,13.61 45.92,16.05 43.79,18.19 K7.S2
N$29  (via drill 0.41)
  Top 0.203: v63.4,23.67 63.4,20.12 v62.38,19.1
  Bottom 0.203: v63.4,23.67 67.26,23.67 67.26,21.64 IC1.12 | v62.38,19.1 62.18,19.3 58.42,19.3 58.01,19.71 37.59,19.71 36.17,18.29 K7.16
N$30
  Top 0.305: K8.S1 26.62,13.11 26.62,12.8 31.09,8.33 GPO8.1
  Bottom 0.305: X1.16 89.92,16.76 86.36,16.76 83.92,14.33 74.88,14.33 74.47,14.73 56.19,14.73 52.83,11.38 34.24,11.38 GPO8.1
N$31  (via drill 0.61)
  Top 0.406: v35.87,46.02 37.49,47.65 45.72,47.65 48.26,45.11 GPO2.3 | JP1.1 9.55,17.58 9.55,13.82 12.7,10.67 U$3.PWR 12.9,10.57 12.9,9.96 15.04,7.82 15.85,7.82 16.26,8.23 20.93,8.23 GPO8.3 21.13,8.23 22.86,8.23 25.4,5.69 v35.56,5.69 | GPO3.3 65.33,45.01 65.33,32.51 64.21,31.39 64.21,12.9 62.08,10.77 57.71,10.77 55.27,8.33 GPO6.3
  Bottom 0.406: v35.87,46.02 32.11,46.02 31.19,45.11 GPO1.3 | 67.77,42.67 67.87,42.57 80.06,42.57 82.5,45.01 GPO4.3 | 67.77,42.67 65.43,45.01 GPO3.3 | GPO2.3 48.26,45.01 50.7,42.57 67.67,42.57 67.77,42.67 | GPO5.3 72.34,8.23 69.8,5.69 57.81,5.69 GPO6.3 52.73,10.77 40.54,10.77 38.1,8.33 GPO7.3 38,8.13 v35.56,5.69
N$32
  Top 0.203: LED8.C 28.65,13.51 28.65,16.15 26.62,18.19 K8.S2
N$33
  Bottom 0.203: IC1.11 68.58,20.02 69.9,20.02 71.32,18.59 71.32,17.37 28.85,17.37 27.13,19.1 19.81,19.1 19,18.29 K8.16
N$34  (via drill 0.41)
  Top 0.203: v45.31,33.12 v42.37,30.18
  Bottom 0.203: v42.37,30.18 32.92,30.18 IC2.2 | v45.31,33.12 45.41,33.02 60.15,33.02 60.96,32.21 IC1.2
N$35
  Bottom 0.203: IC2.3 32.92,29.67 33.83,29.67 33.93,29.77 40.64,29.77 40.95,29.46 50.29,29.46 51.21,30.38 61.47,30.38 62.18,31.09 62.18,31.7 IC1.3
N$36  (via drill 0.41)
  Top 0.203: v34.24,29.06 34.24,30.99 34.14,31.09 v34.14,33.12
  Bottom 0.203: v34.24,29.06 33.02,29.06 32.92,28.96 IC2.4 | v34.14,33.12 34.85,33.83 61.27,33.83 62.08,33.02 62.69,33.02 63.5,32.21 IC1.4
N$37  (via drill 0.41)
  Top 0.203: v43.18,28.75 43.18,29.97 49.28,36.07 49.28,42.16 54.66,47.55 60.86,47.55 63.3,45.11 63.3,34.44 v64.41,33.33
  Bottom 0.203: v43.18,28.75 41.05,28.75 40.64,28.35 32.92,28.35 IC2.5 | v64.41,33.33 64.41,31.7 IC1.5
N$38  (via drill 0.41)
  Top 0.203: v28.75,29.16 31.09,29.16 33.33,31.39 33.33,33.43 v36.58,36.68 | v67.06,36.68 68.28,35.46 68.28,34.44 v67.67,33.83
  Bottom 0.203: v28.75,29.16 30.18,27.74 32.82,27.74 IC2.6 | v67.06,36.68 v36.58,36.68 | v67.67,33.83 66.04,32.21 IC1.6
N$39  (via drill 0.41)
  Top 0.203: v62.89,27.03 v61.06,25.2
  Bottom 0.203: v61.06,25.2 59.64,25.2 57.4,22.96 39.73,22.96 39.73,26.11 40.23,26.62 42.88,26.62 42.88,28.04 42.57,28.35 41.25,28.35 40.84,27.94 34.75,27.94 33.93,27.13 33.02,27.13 32.92,27.03 IC2.7 | v62.89,27.03 66.24,30.38 66.55,30.38 67.26,31.09 67.26,31.7 IC1.7
N$40  (via drill 0.41)
  Top 0.203: v34.95,27.13 34.95,30.79 34.65,31.09 34.65,31.19 34.54,31.29 34.54,31.9 v38.61,35.97
  Bottom 0.203: v34.95,27.13 34.54,27.13 33.83,26.42 32.92,26.42 IC2.8 | v38.61,35.97 67.77,35.97 68.58,35.15 IC1.8
N$41
  Top 0.203: R7.1 68.17,12.8 67.16,12.8 66.24,13.72 LED6.A
N$42
  Top 0.203: R8.1 85.45,13.01 83.72,13.01 83.21,13.51 LED5.A
N$43
  Top 0.203: R9.1 69.49,38.71 70.31,38.71 71.42,39.83 LED4.A
N$44
  Top 0.203: R10.1 52.53,38.41 53.14,38.41 54.36,39.62 LED3.A
N$45
  Top 0.203: R11.1 35.36,38.41 35.97,38.41 37.19,39.62 LED2.A
N$46
  Top 0.203: R12.1 18.69,40.03 20.02,40.03 20.12,39.93 LED1.A
N$47
  Top 0.203: OK1.3 R13.2
N$48
  Top 0.203: OK1.1 R14.2
N$49
  Top 0.152: X1.10 90.32,34.95 91.24,35.87 91.24,42.27 84.94,48.56 31.6,48.56 28.96,45.92 28.96,32.82 28.04,31.9 28.04,27.84 30.07,25.81 30.07,25.4 OK1.2
N$50
  Top 0.203: R15.2 49.89,21.64 49.17,21.64 OK2.1
N$51  (via drill 0.41)
  Top 0.203: v22.15,24.28 20.73,22.86 OK1.8
  Bottom 0.203: v22.15,24.28 24.08,26.21 25.4,26.21 25.5,26.31 IC2.21
N$52
  Top 0.203: R16.2 49.89,31.7 49.89,29.87 OK2.3
N$53
  Top 0.203: OK3.1 R17.2
N$54
  Top 0.203: OK3.3 R18.2
N$55  (via drill 0.3)
  Top 0.152: OK3.2 68.68,25.4 v70.31,23.77
  Bottom 0.152: v70.31,23.77 70.51,23.57 72.24,23.57 72.34,23.47 87.17,23.47 87.58,23.88 X1.6
N$56
  Top 0.203: OK4.1 85.55,22.86 R19.2
N$57
  Top 0.203: OK4.3 85.55,27.94 R20.2
N$60  (via drill 0.3)
  Top 0.152: v76,34.44 76,40.13 75.18,40.95 73.56,40.95 66.34,48.16 36.88,48.16 35.05,46.33 35.05,46.02 32.21,43.18 32.21,36.17 30.18,34.14 OK1.4
  Bottom 0.152: v76,34.44 78.23,32.21 87.58,32.21 X1.9
N$61  (via drill 0.3)
  Top 0.152: OK2.2 48.56,25.4 50.6,23.37 54.15,23.37 v54.86,24.08
  Bottom 0.152: v54.86,24.08 57.1,26.31 84.53,26.31 87.58,29.36 X1.8
N$62  (via drill 0.3)
  Top 0.152: v46.43,26.01 46.43,28.65 47.85,30.07 47.85,30.48 OK2.4
  Bottom 0.152: v46.43,26.01 49.07,23.37 57.2,23.37 59.74,25.91 86.87,25.91 X1.7
N$63  (via drill 0.41)
  Top 0.203: v79.15,44.3 79.15,41.45 80.06,40.54 80.06,34.54 v75.59,30.07 | v72.54,29.26 73.86,27.94 OK4.6
  Bottom 0.203: v79.15,44.3 79.15,46.43 78.03,47.55 36.68,47.55 36.68,45.72 33.63,42.67 26.82,42.67 26.82,35.15 25.91,34.24 25.6,34.24 25.6,30.99 IC2.28 | v75.59,30.07 74.78,29.26 v72.54,29.26
N$64  (via drill 0.3)
  Top 0.152: OK3.4 66.65,30.48 68.58,28.55 68.58,26.42 v69.7,25.3
  Bottom 0.152: v69.7,25.3 69.7,23.16 72.14,23.16 73.76,21.54 87.27,21.54 87.58,21.23 X1.5
N$65
  Top 0.152: OK4.2 83.41,25.4 83.41,24.99 82.19,23.77 82.19,21.95 83.01,21.13 84.84,21.13 87.58,18.39 X1.4
N$66
  Top 0.152: OK4.4 83.41,30.48 83.41,30.07 77.11,23.77 77.11,15.24 79.25,13.11 79.25,12.8 79.96,12.09 86.06,12.09 86.56,12.6 86.56,14.53 87.58,15.54 X1.3
N$68  (via drill 0.41)
  Top 0.203: v19,26.92 19.61,26.92 OK1.6
  Bottom 0.203: v19,26.92 25.5,26.92 IC2.22
N$69  (via drill 0.41)
  Top 0.203: v28.55,25.5 28.55,21.74 v28.65,21.64 | v35.87,21.64 37.19,21.64 OK2.8
  Bottom 0.203: v28.55,25.5 26.52,27.53 25.7,27.53 25.6,27.64 IC2.23 | v35.87,21.64 v28.65,21.64
N$70  (via drill 0.41)
  Top 0.203: v35.26,31.6 35.26,31.09 OK2.6
  Bottom 0.203: v35.26,31.6 30.18,31.6 26.92,28.35 25.6,28.35 IC2.24
N$71  (via drill 0.41)
  Top 0.203: v24.18,27.64 24.18,25.09 28.65,20.62 32.61,20.62 v32.72,20.52 | v53.85,20.52 OK3.8
  Bottom 0.203: v24.18,27.64 24.18,28.35 24.69,28.85 25.5,28.85 IC2.25 | v53.85,20.52 v32.72,20.52
N$72  (via drill 0.41)
  Top 0.203: v52.83,31.6 52.83,31.29 OK3.6
  Bottom 0.203: v52.83,31.6 52.02,32.41 30.38,32.41 27.64,29.67 25.6,29.67 IC2.26
N$73  (via drill 0.41)
  Top 0.203: v72.54,24.18 73.86,22.86 OK4.8
  Bottom 0.203: v72.54,24.18 73.36,24.99 87.48,24.99 88.9,26.42 91.24,26.42 91.24,31.29 90.63,31.9 90.32,31.9 88.9,33.33 85.04,33.33 82.4,35.97 80.47,35.97 77.32,39.12 71.32,39.12 70.61,38.41 35.15,38.41 27.13,30.38 25.7,30.38 25.6,30.28 IC2.27
VIN
  Top 0.203: JP1.2 9.45,20.42 9.45,19.3 8.23,18.09 8.23,10.97 13.41,5.79 24.49,5.79 29.06,1.22 43.08,1.22 44.4,2.54 GND.VIN

## Text on the board
_tsilk: SCL SDA | SKAARHOJ 2013 | JP1: VIN => TallyPwr | TallyPwr | TallyPwr | GND | O | PCB-2x8GPIO v13-05-13 | GND
_bsilk: I2C PullUps | "1" | "0" | 1 | I2C to A4/A5